# Altium PCB UZ_D_Voltage_3V3_5V.PcbDoc (part 2 of 2)
Units mm, origin at the board's own origin, x right, y up, seen from the top; angles counter-clockwise.
Board outline 155.98 x 100 mm, 2 copper layers (Top Layer, Bottom Layer), stack 0.68 mm thick; 108 components, 127 nets, 481 pads, 154 vias.
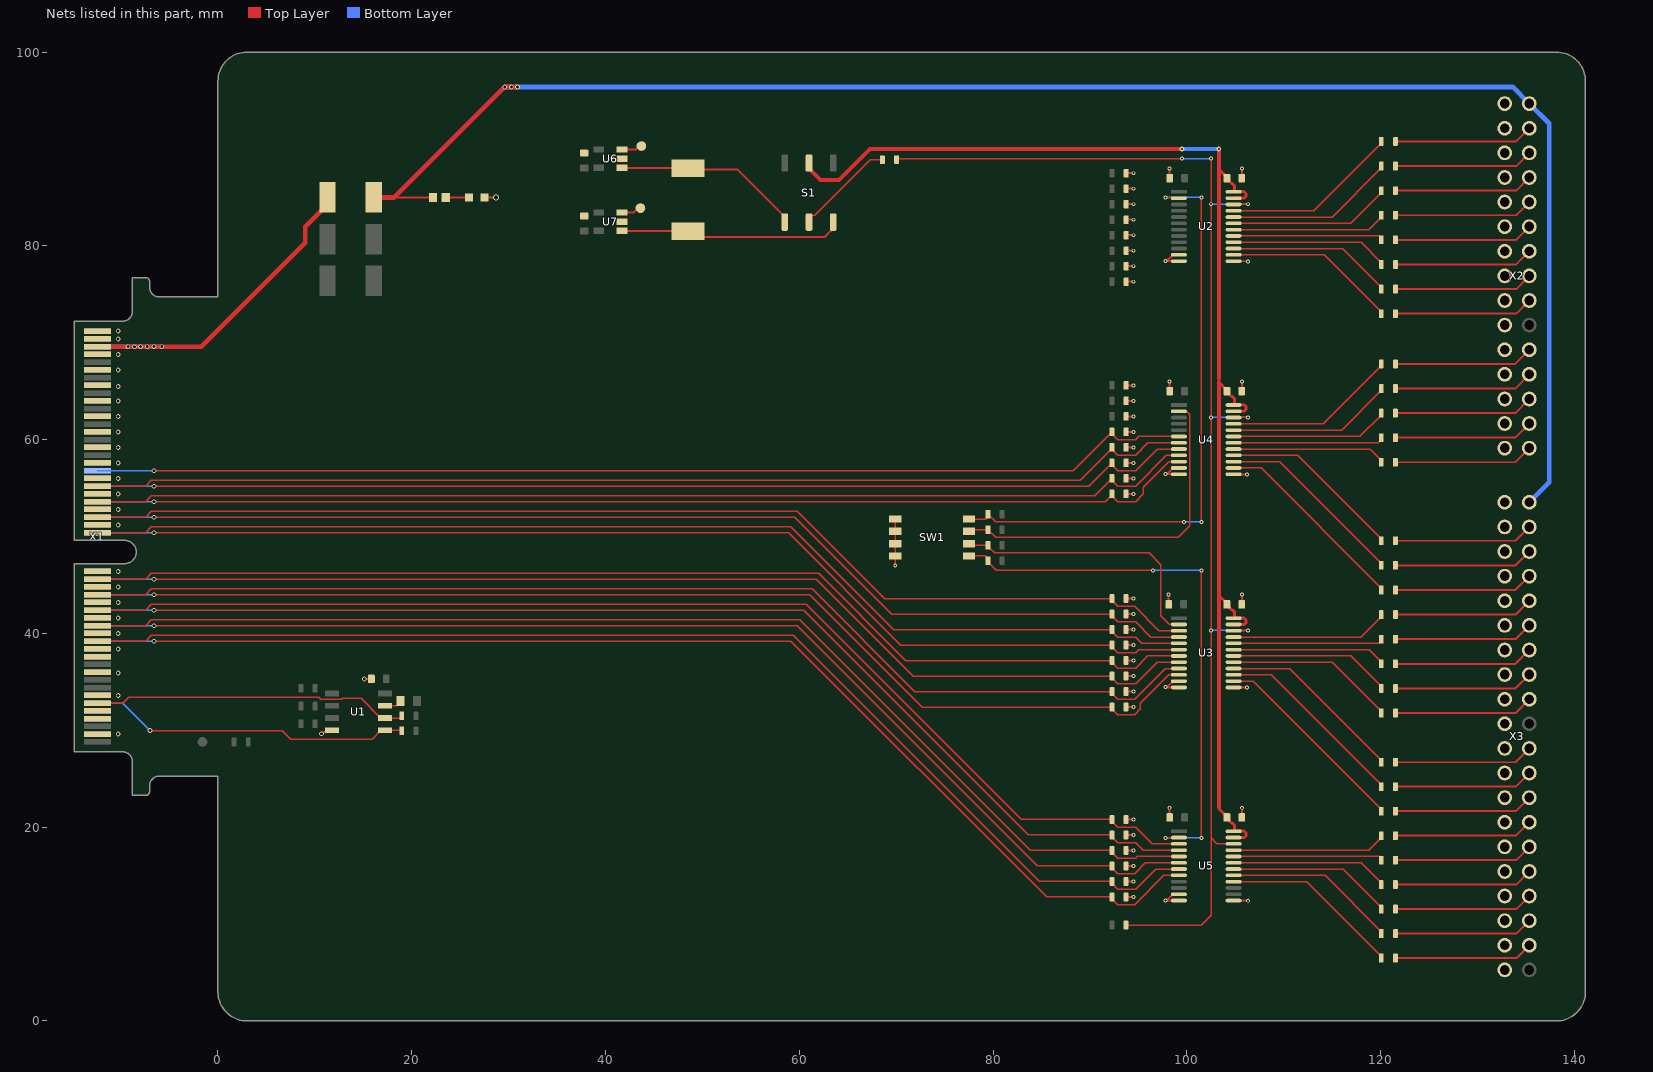
[diagram p2: the nets of this part, all layers, seen from the top]

## Via types
v1: diameter 0.4, hole 0.2, Top Layer to Bottom Layer, 66 vias
v2: diameter 0.5, hole 0.3, Top Layer to Bottom Layer, 49 vias
v3: diameter 0.5, hole 0.3, Top Layer to Bottom Layer, tented both sides, 27 vias
v4: diameter 0.5, hole 0.2, Top Layer to Bottom Layer, 7 vias
v5: diameter 0.4, hole 0.2, Top Layer to Bottom Layer, tented top, 3 vias
v6: diameter 0.4, hole 0.2, Top Layer to Bottom Layer, tented both sides, 1 vias
v7: diameter 0.6, hole 0.4, Top Layer to Bottom Layer, 1 vias

## Nets (pads, with @x,y where several pads share a name; then routed paths per layer and width w, separated by ;. In a path a pad name is that pad's centre, name@x,y a point inside that pad or via, vN(x,y) a via of type N, cw(c..) or ccw(c..) an arc to the next point about the centre after c; other vN are vias at no path point) (continued)
DIG_IO_11: R54.1 U4.6 X1.38 | length 113.8
  Top Layer w0.15: v2(-6.606,56.791) -6.597,56.8 88.3,56.8 R54.1@92.27,60.77 ; R54.1@92.27,60.8 R54.1@92.27,60.77 ; R54.1@92.3,60.8 R54.1@92.27,60.77 ; U4.6@99.1,60.325 95.025,60.325 94.7,60 92.87,60 92.27,60.6 R54.1@92.27,60.77
  Bottom Layer w0.15: X1.38@-12.44,56.791 v2(-6.606,56.791)
DIG_IO_12: R55.1 U4.7 X1.41 | length 114.2
  Top Layer w0.15: X1.41@-12.44,55.191 -7.473,55.191 -6.864,55.8 89,55.8 R55.1@92.27,59.07 ; R55.1@92.27,59.2 R55.1@92.27,59.07 ; R55.1@92.3,59.1 R55.1@92.27,59.07 ; U4.7@99.1,59.675 95.975,59.675 94.7,58.4 92.87,58.4 92.27,59 R55.1@92.27,59.07
DIG_IO_13: R56.1 U4.8 X1.42 | length 113.9
  Top Layer w0.15: v2(-6.606,55.191) 89.891,55.191 R56.1@92.27,57.57 ; R56.1@92.27,57.6 R56.1@92.27,57.57 ; R56.1@92.3,57.6 R56.1@92.27,57.57 ; U4.8@99.1,59.025 96.925,59.025 94.7,56.8 92.87,56.8 92.27,57.4 R56.1@92.27,57.57
  Bottom Layer w0.15: X1.42@-12.44,55.191 v2(-6.606,55.191)
DIG_IO_14: R57.1 U4.9 X1.45 | length 114.3
  Top Layer w0.15: X1.45@-12.44,53.591 -7.473,53.591 -6.864,54.2 90.5,54.2 R57.1@92.27,55.97 ; R57.1@92.27,56 R57.1@92.27,55.97 ; R57.1@92.3,56 R57.1@92.27,55.97 ; U4.9@99.1,58.375 97.875,58.375 94.7,55.2 92.87,55.2 92.27,55.8 R57.1@92.27,55.97
DIG_IO_15: R58.1 U4.10 X1.46 | length 114.4
  Top Layer w0.15: v2(-6.606,53.591) -6.597,53.6 91.6,53.6 R58.1@92.27,54.27 ; R58.1@92.27,54.4 R58.1@92.27,54.27 ; R58.1@92.3,54.3 R58.1@92.27,54.27 ; U4.10@99.1,57.725 98.125,57.725 95.5,55.1 95.5,54.4 94.7,53.6 92.87,53.6 92.27,54.2 R58.1@92.27,54.27
  Bottom Layer w0.15: X1.46@-12.44,53.591 v2(-6.606,53.591)
DIG_IO_16: R59.1 U3.3 X1.49 | length 117
  Top Layer w0.15: X1.49@-12.44,51.991 -7.473,51.991 -6.864,52.6 59.8,52.6 68.8,43.6 R59.1@92.27,43.6 92.27,43.4 92.87,42.8 94.6,42.8 97.125,40.275 U3.3@99.1,40.275
DIG_IO_17: R60.1 U3.4 X1.50 | length 116.8
  Top Layer w0.15: v2(-6.606,51.991) -6.597,52 59.551,52 69.551,42 R60.1@92.27,42 92.27,41.8 92.87,41.2 94.7,41.2 96.275,39.625 U3.4@99.1,39.625
  Bottom Layer w0.15: X1.50@-12.44,51.991 v2(-6.606,51.991)
DIG_IO_18: R61.1 U3.5 X1.53 | length 116.9
  Top Layer w0.15: X1.53@-12.44,50.391 -7.473,50.391 -6.864,51 59.137,51 69.737,40.4 R61.1@92.27,40.4 92.27,40.2 92.87,39.6 94.7,39.6 95.325,38.975 U3.5@99.1,38.975
DIG_IO_19: R62.1 U3.6 X1.54 | length 116.9
  Top Layer w0.15: v2(-6.606,50.391) -6.597,50.4 58.889,50.4 70.489,38.8 R62.1@92.27,38.8 92.27,38.6 92.87,38 94.7,38 95.025,38.325 U3.6@99.1,38.325
  Bottom Layer w0.15: X1.54@-12.44,50.391 v2(-6.606,50.391)
DIG_IO_20: R63.1 U3.7 X1.57 | length 116.5
  Top Layer w0.15: X1.57@-12.44,45.591 -7.473,45.591 -6.864,46.2 62,46.2 71,37.2 R63.1@92.27,37.2 ; R63.1@92.3,37.2 R63.1@92.27,37.2 ; U3.7@99.1,37.675 95.975,37.675 94.7,36.4 92.87,36.4 92.27,37 R63.1@92.27,37.2
DIG_IO_21: R64.1 U3.8 X1.58 | length 117.1
  Top Layer w0.15: v2(-6.606,45.591) -6.597,45.6 61.751,45.6 71.751,35.6 R64.1@92.27,35.6 92.27,35.4 92.87,34.8 94.7,34.8 96.925,37.025 U3.8@99.1,37.025
  Bottom Layer w0.15: X1.58@-12.44,45.591 v2(-6.606,45.591)
DIG_IO_22: R65.1 U3.9 X1.61 | length 117.9
  Top Layer w0.15: X1.61@-12.44,43.991 -7.473,43.991 -6.864,44.6 61.337,44.6 71.937,34 R65.1@92.27,34 92.27,33.8 92.87,33.2 94.6,33.2 97.775,36.375 U3.9@99.1,36.375
DIG_IO_23: R66.1 U3.10 X1.62 | length 118.9
  Top Layer w0.15: v2(-6.606,43.991) -6.597,44 61.089,44 72.689,32.4 R66.1@92.27,32.4 92.27,32.2 92.87,31.6 94.6,31.6 95.2,32.2 95.2,32.8 98.125,35.725 U3.10@99.1,35.725
  Bottom Layer w0.15: X1.62@-12.44,43.991 v2(-6.606,43.991)
DIG_IO_24: R67.1 U5.3 X1.65 | length 122.2
  Top Layer w0.15: X1.65@-12.44,42.391 -7.473,42.391 -6.864,43 60.7,43 82.9,20.8 R67.1@92.27,20.8 92.27,20.6 92.87,20 94.7,20 96.425,18.275 U5.3@99.1,18.275
DIG_IO_25: R68.1 U5.4 X1.66 | length 121.9
  Top Layer w0.15: v2(-6.606,42.391) -6.597,42.4 60.451,42.4 83.651,19.2 R68.1@92.27,19.2 92.27,19 92.87,18.4 94.7,18.4 95.475,17.625 U5.4@99.1,17.625
  Bottom Layer w0.15: X1.66@-12.44,42.391 v2(-6.606,42.391)
DIG_IO_26: R69.1 U5.5 X1.69 | length 122.2
  Top Layer w0.15: X1.69@-12.44,40.791 -7.473,40.791 -6.864,41.4 60.037,41.4 83.837,17.6 R69.1@92.27,17.6 92.27,17.4 92.87,16.8 94.7,16.8 94.875,16.975 U5.5@99.1,16.975
DIG_IO_27: R70.1 U5.6 X1.70 | length 122.7
  Top Layer w0.15: v2(-6.606,40.791) 59.785,40.791 84.576,16 R70.1@92.27,16 92.27,15.8 92.87,15.2 94.6,15.2 95.725,16.325 U5.6@99.1,16.325
  Bottom Layer w0.15: X1.70@-12.44,40.791 v2(-6.606,40.791)
DIG_IO_28: R71.1 U5.7 X1.73 | length 123.7
  Top Layer w0.15: X1.73@-12.44,39.191 -7.473,39.191 -6.864,39.8 59.375,39.8 84.775,14.4 R71.1@92.27,14.4 ; R71.1@92.3,14.4 R71.1@92.27,14.4 ; U5.7@99.1,15.675 96.775,15.675 94.7,13.6 92.87,13.6 92.27,14.2 R71.1@92.27,14.4
DIG_IO_29: R72.1 U5.8 X1.74 | length 124.2
  Top Layer w0.15: v2(-6.606,39.191) -6.597,39.2 59.126,39.2 85.526,12.8 R72.1@92.27,12.8 92.27,12.6 92.87,12 94.6,12 97.625,15.025 U5.8@99.1,15.025
  Bottom Layer w0.15: X1.74@-12.44,39.191 v2(-6.606,39.191)
DIG_IO_EXT_00: R9.1 U2.21 | length 18.3
  Top Layer w0.15: U2.21@104.9,83.625 113.115,83.625 120.07,90.58 R9.1@120.07,90.78
DIG_IO_EXT_01: R10.1 U2.20 | length 17.5
  Top Layer w0.15: U2.20@104.9,82.975 115.005,82.975 120.07,88.04 R10.1@120.07,88.24
DIG_IO_EXT_02: R11.1 U2.19 | length 16.7
  Top Layer w0.15: U2.19@104.9,82.325 116.895,82.325 120.07,85.5 R11.1@120.07,85.7
DIG_IO_EXT_03: R12.1 U2.18 | length 15.9
  Top Layer w0.15: U2.18@104.9,81.675 118.785,81.675 120.07,82.96 R12.1@120.07,83.16
DIG_IO_EXT_04: R13.1 U2.17 | length 15.5
  Top Layer w0.15: U2.17@104.9,81.025 119.861,81.025 120.07,80.816 R13.1@120.07,80.62
DIG_IO_EXT_05: R14.1 U2.16 | length 16.2
  Top Layer w0.15: U2.16@104.9,80.375 117.975,80.375 120.07,78.28 R14.1@120.07,78.08
DIG_IO_EXT_06: R15.1 U2.15 | length 17
  Top Layer w0.15: U2.15@104.9,79.725 116.085,79.725 120.07,75.74 R15.1@120.07,75.54
DIG_IO_EXT_07: R16.1 U2.14 | length 17.8
  Top Layer w0.15: U2.14@104.9,79.075 114.195,79.075 120.07,73.2 R16.1@120.07,73
DIG_IO_EXT_08: R17.1 U4.21 | length 17.9
  Top Layer w0.15: U4.21@104.9,61.625 114.082,61.625 120.07,67.612 R17.1@120.07,67.813
DIG_IO_EXT_09: R18.1 U4.20 | length 17.1
  Top Layer w0.15: U4.20@104.9,60.975 115.97,60.975 120.07,65.075 R18.1@120.07,65.275
DIG_IO_EXT_10: R19.1 U4.19 | length 16.3
  Top Layer w0.15: U4.19@104.9,60.325 117.858,60.325 120.07,62.537 R19.1@120.07,62.737
DIG_IO_EXT_11: R20.1 U4.18 | length 15.5
  Top Layer w0.15: U4.18@104.9,59.675 119.741,59.675 120.07,60.004 R20.1@120.07,60.2
DIG_IO_EXT_12: R21.1 U4.17 | length 15.9
  Top Layer w0.15: U4.17@104.9,59.025 118.907,59.025 120.07,57.863 R21.1@120.07,57.662
DIG_IO_EXT_13: R22.1 U4.16 | length 18.9
  Top Layer w0.15: U4.16@104.9,58.375 111.458,58.375 120.07,49.763 R22.1@120.07,49.563
DIG_IO_EXT_14: R23.1 U4.15 | length 19.7
  Top Layer w0.15: U4.15@104.9,57.725 109.568,57.725 120.07,47.223 R23.1@120.07,47.023
DIG_IO_EXT_15: R24.1 U4.14 | length 20.5
  Top Layer w0.15: U4.14@104.9,57.075 107.678,57.075 120.07,44.683 R24.1@120.07,44.483
DIG_IO_EXT_16: R25.1 U3.21 | length 16.2
  Top Layer w0.15: U3.21@104.9,39.625 117.952,39.625 120.07,41.743 R25.1@120.07,41.943
DIG_IO_EXT_17: R26.1 U3.20 | length 15.5
  Top Layer w0.15: U3.20@104.9,38.975 119.838,38.975 120.07,39.207 R26.1@120.07,39.403
DIG_IO_EXT_18: R27.1 U3.19 | length 15.9
  Top Layer w0.15: U3.19@104.9,38.325 118.808,38.325 120.07,37.063 R27.1@120.07,36.863
DIG_IO_EXT_19: R28.1 U3.18 | length 16.7
  Top Layer w0.15: U3.18@104.9,37.675 116.918,37.675 120.07,34.523 R28.1@120.07,34.323
DIG_IO_EXT_20: R29.1 U3.17 | length 17.5
  Top Layer w0.15: U3.17@104.9,37.025 115.028,37.025 120.07,31.983 R29.1@120.07,31.783
DIG_IO_EXT_21: R30.1 U3.16 | length 19.3
  Top Layer w0.15: U3.16@104.9,36.375 110.598,36.375 120.07,26.903 R30.1@120.07,26.703
DIG_IO_EXT_22: R31.1 U3.15 | length 20.1
  Top Layer w0.15: U3.15@104.9,35.725 108.722,35.725 120.07,24.377 R31.1@120.07,24.177
DIG_IO_EXT_23: R32.1 U3.14 | length 20.8
  Top Layer w0.15: U3.14@104.9,35.075 106.847,35.075 120.07,21.852 R32.1@120.07,21.652
DIG_IO_EXT_24: R33.1 U5.21 | length 15.9
  Top Layer w0.15: U5.21@104.9,17.625 118.769,17.625 120.07,18.926 R33.1@120.07,19.126
DIG_IO_EXT_25: R34.1 U5.20 | length 15.4
  Top Layer w0.15: U5.20@104.9,16.975 119.891,16.975 120.07,16.796 R34.1@120.07,16.6
DIG_IO_EXT_26: R35.1 U5.19 | length 16.2
  Top Layer w0.15: U5.19@104.9,16.325 118.019,16.325 120.07,14.274 R35.1@120.07,14.074
DIG_IO_EXT_27: R36.1 U5.18 | length 17
  Top Layer w0.15: U5.18@104.9,15.675 116.143,15.675 120.07,11.748 R36.1@120.07,11.548
DIG_IO_EXT_28: R37.1 U5.17 | length 17.8
  Top Layer w0.15: U5.17@104.9,15.025 114.267,15.025 120.07,9.222 R37.1@120.07,9.022
DIG_IO_EXT_29: R38.1 U5.16 | length 18.6
  Top Layer w0.15: U5.16@104.9,14.375 112.392,14.375 120.07,6.697 R38.1@120.07,6.497
DIG_Res_00: X1.78
DIG_Res_03: X1.91
DIG_Res_04: X1.92
DIG_Res_05: X1.93
DIG_Res_06: X1.94
DIG_Res_08: X1.77
DIR1: R2.1 SW1.8 U2.2 | length 63.2
  Top Layer w0.15: SW1.8@77.51,51.805 79.171,51.805 79.47,52.104 R2.1@79.47,52.3 80.27,51.5 99.1,51.5 v1(99.7,51.5) ; v1(97.8,85) 97.838,84.962 99.063,84.962 U2.2@99.1,84.925 ; v1(101.5,51.5) v1(101.5,85)
  Bottom Layer w0.15: v1(97.8,85) v1(101.5,85) ; v1(99.7,51.5) v1(101.5,51.5)
DIR2: R39.1 SW1.7 U4.2 | length 36.4
  Top Layer w0.15: SW1.7@77.51,50.535 77.675,50.7 R39.1@79.47,50.7 80.27,49.9 99.1,49.9 100.3,51.1 100.3,62.6 100,62.9 99.2,62.9 U4.2@99.175,62.925
DIR3: R40.1 SW1.6 U3.2 | length 28.3
  Top Layer w0.15: SW1.6@77.51,49.265 77.675,49.1 R40.1@79.47,49.1 79.47,48.904 79.644,48.73 79.722,48.73 80.152,48.3 96.1,48.3 97.3,47.1 97.3,41.8 98.175,40.925 U3.2@99.1,40.925
DIR4: R41.1 SW1.5 U5.2 | length 57.4
  Top Layer w0.15: SW1.5@77.51,47.995 79.171,47.995 79.47,47.696 79.47,47.304 79.644,47.13 79.722,47.13 80.352,46.5 v1(96.5,46.5) ; v1(97.8,18.9) 97.813,18.913 99.088,18.913 U5.2@99.1,18.925 ; v1(101.5,18.9) v1(101.5,46.5)
  Bottom Layer w0.15: v1(96.5,46.5) v1(101.5,46.5) ; v1(97.8,18.9) v1(101.5,18.9)
GND: C1.2 C2.2 C3.2 C4.2 C5.2 C6.2 C7.2 C8.2 C9.2 C10.2 C11.2 D1.1 R43.2 R44.2 R45.2 R46.2 R47.2 R48.2 R49.2 R50.2 R51.2 R52.2 R53.2 R54.2 R55.2 R56.2 R57.2 R58.2 R59.2 R60.2 R61.2 R62.2 R63.2 R64.2 R65.2 R66.2 R67.2 R68.2 R69.2 R70.2 R71.2 R72.2 SW1.1 SW1.2 SW1.3 SW1.4 U1.4 U2.11 U2.12 U2.13 U3.11 U3.12 U3.13 U4.11 U4.12 U4.13 U5.11 U5.12 U5.13 U6.2 U7.2 X1.1 X1.2 X1.3 X1.4 X1.7 X1.8 X1.11 X1.12 X1.15 X1.16 X1.19 X1.20 X1.23 X1.24 X1.27 X1.28 X1.31 X1.32 X1.35 X1.36 X1.39 X1.40 X1.43 X1.44 X1.47 X1.48 X1.51 X1.52 X1.55 X1.56 X1.59 X1.60 X1.63 X1.64 X1.67 X1.68 X1.71 X1.72 X1.75 X1.76 X1.81 X1.82 X1.87 X1.88 X1.97 X1.98 X2.16 X2.17 X2.18 X2.19 X2.20 X2.21 X2.22 X2.23 X2.24 X2.25 X2.26 X2.27 X2.28 X2.29 X2.30 X3.21 X3.22 X3.23 X3.24 X3.25 X3.26 X3.27 X3.28 X3.29 X3.30 X3.31 X3.32 X3.33 X3.34 X3.35 X3.36 X3.37 X3.38 X3.39 X3.40 | length 56.2
  Top Layer w0.2: v2(15.1,35.3) 15.897,35.3 C1.2@15.9,35.297 ; D1.1@27.5,85 v7(28.7,85) ; SW1.1@69.89,51.805 69.9,51.795 v1(69.9,47) ; R72.2@93.73,12.8 v1(94.5,12.8) ; R71.2@93.73,14.4 v1(94.5,14.4) ; R70.2@93.73,16 v1(94.5,16) ; R69.2@93.73,17.6 v1(94.5,17.6) ; R68.2@93.73,19.2 v1(94.5,19.2) ; R67.2@93.73,20.8 v1(94.5,20.8) ; R66.2@93.73,32.4 v1(94.5,32.4) ; R65.2@93.73,34 v1(94.5,34) ; R64.2@93.73,35.6 v1(94.5,35.6) ; R63.2@93.73,37.2 v1(94.5,37.2) ; R62.2@93.73,38.8 v1(94.5,38.8) ; R61.2@93.73,40.4 v1(94.5,40.4) ; R60.2@93.73,42 v1(94.5,42) ; R59.2@93.73,43.6 v1(94.5,43.6) ; R58.2@93.73,54.4 v1(94.5,54.4) ; R57.2@93.73,56 v1(94.5,56) ; R56.2@93.73,57.6 v1(94.5,57.6) ; R55.2@93.73,59.2 v1(94.5,59.2) ; R54.2@93.73,60.8 v1(94.5,60.8) ; R53.2@93.73,62.4 v1(94.5,62.4) ; R52.2@93.73,64 v1(94.5,64) ; R51.2@93.73,65.6 v1(94.5,65.6) ; R50.2@93.73,76.3 v1(94.5,76.3) ; R49.2@93.73,77.9 v1(94.5,77.9) ; R48.2@93.73,79.5 v1(94.5,79.5) ; R47.2@93.73,81.1 v1(94.5,81.1) ; R46.2@93.73,82.7 v1(94.5,82.7) ; R45.2@93.73,84.3 v1(94.5,84.3) ; R44.2@93.73,85.9 v1(94.5,85.9) ; R43.2@93.73,87.5 v1(94.5,87.5) ; v1(98.1,44) 98.115,43.985 98.115,43.015 C3.2@98.13,43 ; v1(98.2,22) 98.215,21.985 98.215,21.015 C7.2@98.23,21 ; v1(98.2,66) 98.215,65.985 98.215,65.015 C6.2@98.23,65 ; v1(98.2,88) 98.215,87.985 98.215,87.015 C2.2@98.23,87 ; U5.12@99.1,12.425 99.088,12.438 97.812,12.438 v1(97.8,12.45) 97.838,12.488 97.988,12.488 98.575,13.075 U5.11@99.1,13.075 ; U3.12@99.1,34.425 99.088,34.438 97.812,34.438 v1(97.8,34.45) 97.838,34.488 97.988,34.488 98.575,35.075 U3.11@99.1,35.075 ; U4.12@99.1,56.425 99.088,56.437 97.812,56.437 v1(97.8,56.45) 97.838,56.488 97.988,56.488 98.575,57.075 U4.11@99.1,57.075 ; U2.12@99.1,78.425 99.088,78.438 97.812,78.438 v1(97.8,78.45) 97.838,78.488 97.988,78.488 98.575,79.075 U2.11@99.1,79.075 ; U5.13@104.9,12.425 104.912,12.413 106.287,12.413 v1(106.3,12.4) ; U3.13@104.9,34.425 104.912,34.413 106.187,34.413 v6(106.2,34.4) ; U4.13@104.9,56.425 104.913,56.412 106.188,56.412 v1(106.2,56.4) ; U2.13@104.9,78.425 104.913,78.413 106.288,78.413 v1(106.3,78.4) ; C9.2@105.67,21 105.685,21.015 105.685,21.985 v1(105.7,22) ; C5.2@105.67,43 105.685,43.015 105.685,43.985 v1(105.7,44) ; C8.2@105.67,65 105.685,65.015 105.685,65.985 v1(105.7,66) ; C4.2@105.67,87 105.685,87.015 105.685,87.985 v1(105.7,88)
  Top Layer w0.254: v2(10.686,29.642) 10.752,29.642 10.932,29.822 11.602,29.822 U1.4@11.775,29.995
  other v2: -10.3,29.6 -10.3,33.6 -10.3,35.9 -10.3,38.4 -10.3,40 -10.3,41.6 -10.3,43.2 -10.3,44.8 -10.3,46.4 -10.3,51.2 -10.3,52.8 -10.3,54.4 -10.3,56 -10.3,57.6 -10.3,59.2 -10.3,60.8 -10.3,62.4 -10.3,64 -10.3,65.5 -10.3,67.2 -10.3,68.8 -10.3,70.4 -10.3,71.2
I2C0_SCL: R7.2 U1.6 X1.89 | length 32.8
  Top Layer w0.15: X1.89@-12.44,32.791 -9.809,32.791 -9.2,33.4 10.4,33.4 10.6,33.2 12.768,33.2 12.893,33.325 13.861,33.325 13.886,33.3 14.765,33.3 16.8,31.265 U1.6@17.225,31.265 18.827,31.265 R7.2@19.05,31.488
I2C0_SDA: R6.2 U1.5 X1.90 | length 33.4
  Top Layer w0.15: v2(-7,29.966) 6.634,29.966 7.5,29.1 15.905,29.1 16.8,29.995 U1.5@17.225,29.995 19.013,29.995 R6.2@19.05,29.958
  Bottom Layer w0.15: X1.90@-12.44,32.791 -9.825,32.791 v2(-7,29.966)
NetD1_2: D1.2 R8.1 | length 2.4
  Top Layer w0.2: R8.1@23.5,85 D1.2@25.9,85
NetR9_2: R9.2 X2.2 | length 14.5
  Top Layer w0.2: R9.2@121.45,90.78 133.988,90.78 X2.2@135.348,92.14
NetR10_2: R10.2 X2.3 | length 14.5
  Top Layer w0.2: R10.2@121.45,88.24 133.988,88.24 X2.3@135.348,89.6
NetR11_2: R11.2 X2.4 | length 14.5
  Top Layer w0.2: R11.2@121.45,85.7 133.988,85.7 X2.4@135.348,87.06
NetR12_2: R12.2 X2.5 | length 14.5
  Top Layer w0.2: R12.2@121.45,83.16 133.988,83.16 X2.5@135.348,84.52
NetR13_2: R13.2 X2.6 | length 14.5
  Top Layer w0.2: R13.2@121.45,80.62 133.988,80.62 X2.6@135.348,81.98
NetR14_2: R14.2 X2.7 | length 14.5
  Top Layer w0.2: R14.2@121.45,78.08 133.988,78.08 X2.7@135.348,79.44
NetR15_2: R15.2 X2.8 | length 14.5
  Top Layer w0.2: R15.2@121.45,75.54 133.988,75.54 X2.8@135.348,76.9
NetR16_2: R16.2 X2.9 | length 14.5
  Top Layer w0.2: R16.2@121.45,73 133.988,73 X2.9@135.348,74.36
NetR17_2: R17.2 X2.11 | length 14.5
  Top Layer w0.2: R17.2@121.45,67.813 133.88,67.813 X2.11@135.348,69.28
NetR18_2: R18.2 X2.12 | length 14.5
  Top Layer w0.2: R18.2@121.45,65.275 133.883,65.275 X2.12@135.348,66.74
NetR19_2: R19.2 X2.13 | length 14.5
  Top Layer w0.2: R19.2@121.45,62.737 133.885,62.737 X2.13@135.348,64.2
NetR20_2: R20.2 X2.14 | length 14.5
  Top Layer w0.2: R20.2@121.45,60.2 133.888,60.2 X2.14@135.348,61.66
NetR21_2: R21.2 X2.15 | length 14.5
  Top Layer w0.2: R21.2@121.45,57.662 133.89,57.662 X2.15@135.348,59.12
NetR22_2: R22.2 X3.2 | length 14.5
  Top Layer w0.2: R22.2@121.45,49.563 133.921,49.563 X3.2@135.348,50.99
NetR23_2: R23.2 X3.3 | length 14.5
  Top Layer w0.2: R23.2@121.45,47.023 133.921,47.023 X3.3@135.348,48.45
NetR24_2: R24.2 X3.4 | length 14.5
  Top Layer w0.2: R24.2@121.45,44.483 133.921,44.483 X3.4@135.348,45.91
NetR25_2: R25.2 X3.5 | length 14.5
  Top Layer w0.2: R25.2@121.45,41.943 133.921,41.943 X3.5@135.348,43.37
NetR26_2: R26.2 X3.6 | length 14.5
  Top Layer w0.2: R26.2@121.45,39.403 133.921,39.403 X3.6@135.348,40.83
NetR27_2: R27.2 X3.7 | length 14.5
  Top Layer w0.2: R27.2@121.45,36.863 133.921,36.863 X3.7@135.348,38.29
NetR28_2: R28.2 X3.8 | length 14.5
  Top Layer w0.2: R28.2@121.45,34.323 133.921,34.323 X3.8@135.348,35.75
NetR29_2: R29.2 X3.9 | length 14.5
  Top Layer w0.2: R29.2@121.45,31.783 133.921,31.783 X3.9@135.348,33.21
NetR30_2: R30.2 X3.11 | length 14.5
  Top Layer w0.2: R30.2@121.45,26.703 133.921,26.703 X3.11@135.348,28.13
NetR31_2: R31.2 X3.12 | length 14.5
  Top Layer w0.2: R31.2@121.45,24.177 133.935,24.177 X3.12@135.348,25.59
NetR32_2: R32.2 X3.13 | length 14.5
  Top Layer w0.2: R32.2@121.45,21.652 133.95,21.652 X3.13@135.348,23.05
NetR33_2: R33.2 X3.14 | length 14.5
  Top Layer w0.2: R33.2@121.45,19.126 133.964,19.126 X3.14@135.348,20.51
NetR34_2: R34.2 X3.15 | length 14.5
  Top Layer w0.2: R34.2@121.45,16.6 133.978,16.6 X3.15@135.348,17.97
NetR35_2: R35.2 X3.16 | length 14.5
  Top Layer w0.2: R35.2@121.45,14.074 133.992,14.074 X3.16@135.348,15.43
NetR36_2: R36.2 X3.17 | length 14.5
  Top Layer w0.2: R36.2@121.45,11.548 134.006,11.548 X3.17@135.348,12.89
NetR37_2: R37.2 X3.18 | length 14.4
  Top Layer w0.2: R37.2@121.45,9.022 134.02,9.022 X3.18@135.348,10.35
NetR38_2: R38.2 X3.19 | length 14.4
  Top Layer w0.2: R38.2@121.45,6.497 134.035,6.497 X3.19@135.348,7.81
NetR42_2: R42.2 S1.5 | length 10.5
  Top Layer w0.15: S1.5@61,82.5 61,82.908 61.268,83.175 61.575,83.175 67.3,88.9 R42.2@68.57,88.9
NetSB1_2: SB1.2 U1.7 | length 1.9
  Top Layer w0.15: U1.7@17.225,32.535 18.474,32.535 18.843,32.904 SB1.2@18.843,33.005
NetTP3_1: TP3.1 U6.3 | length 2.1
  Top Layer w0.2: U6.3@41.7,89.95 43.134,89.95 43.484,90.3 TP3.1@43.7,90.3
NetTP5_1: TP5.1 U7.3 | length 2.1
  Top Layer w0.2: U7.3@41.7,83.45 42.934,83.45 43.384,83.9 TP5.1@43.6,83.9
nOutput_Enable: R42.1 R73.2 U2.22 U3.22 U4.22 U5.22 | length 138.1
  Top Layer w0.15: R42.1@70,89 70.03,89 v1(99.5,89) ; R73.2@93.73,9.9 101.5,9.9 102.5,10.9 102.5,18.9 ; v1(102.5,89) v5(102.5,84.3) v5(102.5,62.3) v5(102.5,40.3) 102.5,18.9 ; U5.22@104.9,18.275 104.875,18.3 103.1,18.3 102.5,18.9 ; U3.22@104.9,40.275 104.913,40.288 106.288,40.288 v1(106.3,40.3) ; U4.22@104.9,62.275 104.913,62.288 106.288,62.288 v1(106.3,62.3) ; U2.22@104.9,84.275 104.913,84.288 106.288,84.288 v1(106.3,84.3)
  Bottom Layer w0.15: v1(99.5,89) v1(102.5,89) ; v5(102.5,40.3) v1(106.3,40.3) ; v5(102.5,62.3) v1(106.3,62.3) ; v5(102.5,84.3) v1(106.3,84.3)
nOutput_Enable_3V3: S1.4 TP2.1 U6.1 | length 18.9
  Top Layer w0.2: U6.1@41.7,88.05 48.45,88.05 TP2.1@48.5,88 48.598,87.902 53.598,87.902 S1.4@58.5,83
nOutput_Enable_5V: S1.6 TP4.1 U7.1 | length 23.1
  Top Layer w0.2: U7.1@41.7,81.55 48.45,81.55 49.1,80.9 62.6,80.9 63.25,81.55 63.25,81.609 63.5,81.859 S1.6@63.5,82.45
VIN: F1.2 R8.2 X2.1 X3.1 | length 172.8
  Top Layer w0.2: 18.2,85 R8.2@22.2,85
  Top Layer w0.5: F1.2@16.09,85 18.2,85 v3(29.6,96.4) v3(30.9,96.4)
  Bottom Layer w0.5: v3(29.6,96.4) 133.628,96.4 X2.1@135.348,94.68 137.4,92.628 137.4,55.582 X3.1@135.348,53.53
  other v3: 30.275,96.391
VIN_unfused: F1.1 X1.5 X1.6 | length 38.2
  Top Layer w0.5: X1.5@-12.44,69.591 v3(-9.306,69.591) v3(-8.006,69.591) v3(-7.306,69.591) v3(-6.606,69.591) v3(-5.806,69.591) -1.709,69.591 9,80.3 9,81.98 10.7,83.68 10.72,83.68 11.31,84.27 F1.1@11.31,85
  Bottom Layer w0.5: X1.6@-12.44,69.591 v3(-9.306,69.591) v3(-8.006,69.591) v3(-7.306,69.591) v3(-6.606,69.591) v3(-5.806,69.591)
  other v3: -8.63,69.582
VOUT: C4.1 C5.1 C8.1 C9.1 S1.2 U2.23 U2.24 U3.23 U3.24 U4.23 U4.24 U5.23 U5.24 | length 136.4
  Top Layer w0.3: 103.3,22.3 103.3,22.1 103.3,21.915 104.13,21.085 C9.1@104.13,21 104.13,20.915 104.603,20.442 104.688,20.442 104.9,20.23 104.9,19.575 104.925,19.6 105.9,19.6 106.1,19.4 106.1,19.101 105.924,18.925 U5.23@104.9,18.925 ; 103.3,44.2 103.3,43.915 104.13,43.085 C5.1@104.13,43 104.13,42.915 104.603,42.442 104.688,42.442 104.9,42.23 104.9,41.575 104.925,41.6 105.9,41.6 106.1,41.4 106.1,41.101 105.924,40.925 U3.23@104.9,40.925 ; 103.3,66.3 103.3,65.915 104.13,65.085 C8.1@104.13,65 104.13,64.915 104.603,64.442 104.688,64.442 104.9,64.23 104.9,63.575 104.925,63.6 105.9,63.6 106.1,63.4 106.1,63.101 105.924,62.925 U4.23@104.9,62.925 ; 103.3,88.1 103.3,87.915 104.13,87.085 C4.1@104.13,87 104.13,86.915 104.603,86.442 104.688,86.442 104.9,86.23 104.9,85.575 104.925,85.6 105.9,85.6 106.1,85.4 106.1,85.101 105.924,84.925 U2.23@104.9,84.925
  Top Layer w0.4: S1.2@61,88 62.2,86.8 64.1,86.8 67.3,90 v4(99.5,90) ; 103.3,22.1 103.3,65.915 ; 103.3,66.3 103.3,87.915 ; 103.3,88.1 v4(103.3,90)
  Bottom Layer w0.4: v4(99.5,90) v4(103.3,90)
pads on no net: U5.9 U5.10 U5.14 U5.15 U6.4 U7.4 X1.96 X2.10

## Polygon pours and split planes (outlines as drawn)
GND on Top Layer "GND_Plane_L01" (solid, remove dead copper, pour order 3): -14.84,27.775 -9.84,27.775 cw(c-9.84,26.775) -8.84,26.775 -8.84,23.275 -7.46,23.275 ccw(c-7.46,23.675) -7.06,23.675 -7.06,24.275 cw(c-6.06,24.275) -6.06,25.275 0,25.275 0,3 ccw(c3,3) 3,0 138.141,0 ccw(c138.141,3) 141.141,3 141.141,97 ccw(c138.141,97) 138.141,100 3,100 ccw(c3,97) 0,97 0,74.725 -6.06,74.725 cw(c-6.06,75.725) -7.06,75.725 -7.06,76.325 ccw(c-7.46,76.325) -7.46,76.725 -8.84,76.725 -8.84,73.225 cw(c-9.84,73.225) -9.84,72.225 -14.84,72.225 -14.84,49.6 -9.64,49.6 cw(c-9.64,48.4) -9.64,47.2 -14.84,47.2
GND on Bottom Layer "GND_Plane_L02" (solid, remove dead copper, pour order 2): -14.84,27.775 -9.84,27.775 cw(c-9.84,26.775) -8.84,26.775 -8.84,23.275 -7.46,23.275 ccw(c-7.46,23.675) -7.06,23.675 -7.06,24.275 cw(c-6.06,24.275) -6.06,25.275 0,25.275 0,3 ccw(c3,3) 3,0 138.141,0 ccw(c138.141,3) 141.141,3 141.141,97 ccw(c138.141,97) 138.141,100 3,100 ccw(c3,97) 0,97 0,74.725 -6.06,74.725 cw(c-6.06,75.725) -7.06,75.725 -7.06,76.325 ccw(c-7.46,76.325) -7.46,76.725 -8.84,76.725 -8.84,73.225 cw(c-9.84,73.225) -9.84,72.225 -14.84,72.225 -14.84,49.6 -9.64,49.6 cw(c-9.64,48.4) -9.64,47.2 -14.84,47.2

## Other copper
Top Layer:
  pour cut-out: -14.853,47.2 -11.3,47.2 -11.3,27.775 -14.853,27.775
  pour cut-out: -14.853,72.225 -11.3,72.225 -11.3,49.6 -14.853,49.6
Bottom Layer:
  pour cut-out: -14.853,47.2 -11.3,47.2 -11.3,27.775 -14.853,27.775
  pour cut-out: -14.853,72.225 -11.3,72.225 -11.3,49.6 -14.853,49.6

## Silkscreen, mask and mechanical layers (free items; w line width, h text height)
Top Overlay:
  lines w0.5: 61,78.1 61,80.9 ; 64.1,55.053 71.8,55.053 ; 73.7,44.3 73.7,59.8 ; 83.4,55.047 75.7,55.047 ; 112.8,98 132.853,98 132.853,96.2 ; 128.7,4.1 131,1.8 135,1.8 135,3.6 ; 128.7,57.9 131,55.6 135,55.6 135,57.4 ; 71.8,55.053 71.8,55.053 ; 71.8,55.053 71.1,54.353 71.1,55.753 71.8,55.053 ; 75.7,55.047 76.4,54.347 76.4,55.747 75.7,55.047 ; 75.7,55.047 75.7,55.047 ; 132.853,96.2 133.553,96.9 132.153,96.9 132.853,96.2 ; 132.853,96.2 132.853,96.2 ; 132.853,96.2 132.853,96.2 ; 135,3.6 135.7,2.9 134.3,2.9 135,3.6 ; 135,3.6 135,3.6 ; 135,3.6 135,3.6 ; 135,57.4 135,57.4 ; 135,57.4 134.3,56.7 135.7,56.7 135,57.4 ; 135,57.4 135,57.4
  text "all left pins are GND" at 112.8,96.2 h1.5
  text "VIN" at 127.621,94.353 h1.5
  text "0" at 128.221,91.753 h1.5
  text "nOE_3V3" at 44.7,89.6 h2
  text "1" at 128.221,89.222 h1.5
  text "2" at 128.221,86.708 h1.5
  text "VIN Indication" at 20.7,86.3 h2
  text "3" at 128.221,84.16 h1.5
  text "Select Interface / Voltage" at 66.1,82.8 h3
  text "4" at 128.221,81.646 h1.5
  text "5" at 128.221,79.115 h1.5
  text "3.3 V" at 54.5,78.5 h2
  text "5 V" at 61.55,78.5 h2
  text "nOE_5V" at 44.291,77.241 h2
  text "6" at 128.221,76.567 h1.5
  text "7" at 128.221,74.053 h1.5
  text "Group 1" at 98.15,72.7 h2
  text "n.c." at 127.821,71.453 h1.5
  text "8" at 128.221,68.953 h1.5
  text "9" at 128.121,66.403 h1.5
  text "10" at 128.121,63.836 h1.5
  text "11" at 128.121,61.286 h1.5
  text "Signal Direction Selection" at 62.2,60.9 h2
  text "12" at 128.121,58.753 h1.5
  text "Output" at 62.375,56.5 h3
  text "Input" at 75.475,56.5 h3
  text "VIN" at 127.521,53.153 h1.5
  text "Group 2" at 98.05,50.7 h2
  text "13" at 128.121,50.553 h1.5
  text "14" at 128.121,48.198 h1.5
  text "Group" at 67.5,47.1 h2 r90
  text "1 / 2 / 3 / 4" at 67.8,46.9 h2
  text "15" at 128.121,45.627 h1.5
  text "OFF" at 68.7,44.1 h2
  text "ON" at 74.3,44.1 h2
  text "16" at 128.121,43.039 h1.5
  text "17" at 128.121,40.484 h1.5
  text "18" at 128.121,37.912 h1.5
  text "19" at 128.121,35.341 h1.5
  text "20" at 128.121,32.753 h1.5
  text "3V3" at 127.921,30.153 h1.5
  text "Group 3" at 98.05,28.7 h2
  text "21" at 128.021,27.653 h1.5
  text "EEPROM" at 10.9,27.2 h2
  text "22" at 128.021,25.13 h1.5
  text "23" at 128.021,22.574 h1.5
  text "24" at 128.021,20.051 h1.5
  text "25" at 128.021,17.511 h1.5
  text ".GGG-.PPP-.Rev 00-" at 44.3,17.4 h3
  text "26" at 128.021,14.955 h1.5
  text "27" at 128.021,12.432 h1.5
  text "28" at 128.021,9.892 h1.5
  text "29" at 128.021,7.353 h1.5
  text "Group 4" at 98.05,6.7 h2
  text "5V" at 127.921,4.753 h1.5
Mechanical 1:
  the board outline again, w0.05

## Dimensions
141.141,0 to 141.141,100 on Mechanical 2
146.143,97.802 to -14.84,72.216 on Mechanical 2
141.141,100 to -14.853,72.225 on Mechanical 2
141.141,100 to 0.031,100 on Mechanical 2